# EAGLE board Intar_Modules_Prototype_Panel (EAGLE 7.3.0)
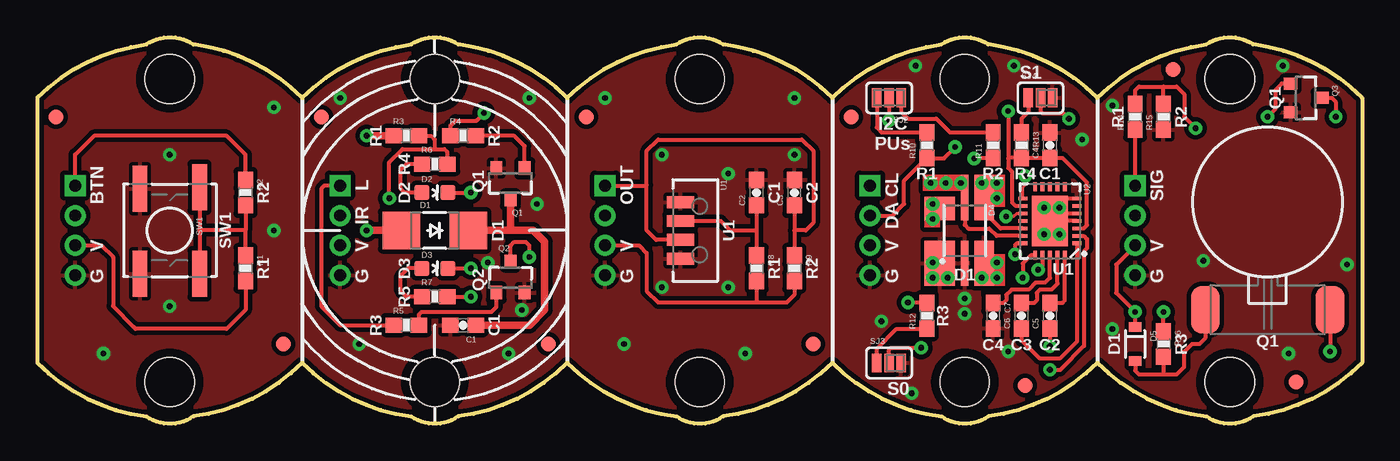
[diagram p0: board, top side]
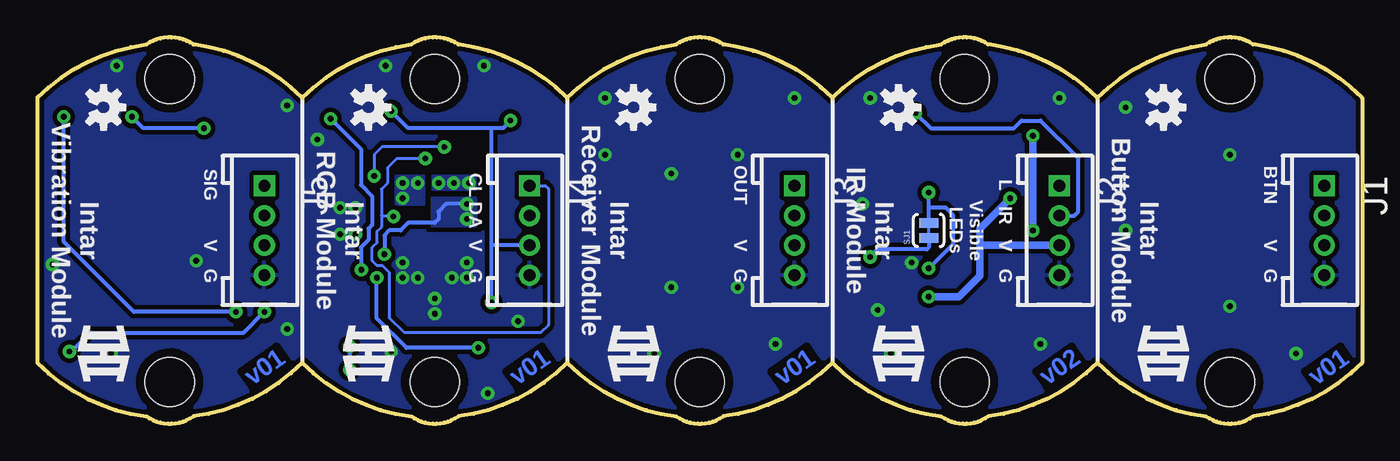
[diagram p1: board, bottom side, seen from below]

Size 88.9 x 25.91 mm. Coordinates in mm from the lower left corner, seen from the top.
Outline: 0,21.85 0,4.07 arc38 7.32,0.48 arc69 10.46,0.48 arc38 17.78,4.07 arc38 25.09,0.48 arc69 28.25,0.48 arc38 35.56,4.07 arc38 42.88,0.48 arc69 46.02,0.48 arc38 53.34,4.07 arc38 60.66,0.48 arc69 63.8,0.48 arc38 71.12,4.07 arc38 78.44,0.48 arc69 81.58,0.48 arc38 88.9,4.07 88.9,21.85 arc38 81.58,25.43 arc69 78.44,25.43 arc38 71.12,21.85 arc38 63.8,25.43 arc69 60.66,25.43 arc38 53.34,21.85 arc38 46.02,25.43 arc69 42.88,25.43 arc38 35.56,21.85 arc38 28.25,25.43 arc69 25.09,25.43 arc38 17.78,21.85 arc38 10.46,25.43 arc69 7.32,25.43 arc38 0,21.85
Copper layers (1*16): Top 0.035mm / dielectric 1.5mm / Bottom 0.035mm
Design rules "SparkFun-2-layer": minimum track width 7mil, minimum drill 15mil, track to track 8mil, track to pad 8mil, pad to pad 8mil, via to via 8mil, smd to smd 8mil, copper to edge 8mil, drill to drill 8mil, minimum pad ring 12mil, minimum via ring 10mil, stop-mask expansion 4mil, vias tented up to drill 20mil, thermal gap 10mil
tRestrict: area 69.5,13.8 to 70,13.9

## Footprints (pad centres in the part's own frame; a part is rotated, then mirrored left to right if it is on the bottom)
0603-CAP = smd 1.1 x 1: 1 -0.85,0; 2 0.85,0
IR42-21C/TR8 = smd 2.5 x 2.5: A 0,-2.25; C 0,2.25
LED-0603 = smd 1 x 1: A 0,-0.877; C 0,0.877
ASMT-YTB7-0AA02_M = smd 3.05 x 2.05: 1 2.2,-1.675 | smd 3.05 x 0.5: 2 2.2,0; 5 -2.2,0 | smd 3.05 x 1.3: 3 2.2,1.3; 4 -2.2,1.3 | smd 1.6 x 2.05: 6 -1.475,-1.675
SOD-323 = smd 0.63 x 0.83: A 1.15,0; C -1.15,0
FIDUCIAL-1X2 = smd 1 x 1: 1 0,0
4P-2.0 = drill 0.8 pad 1.27 square: 1 -3,0 | drill 0.8 pad 1.27: 2 -1,0; 3 1,0; 4 3,0
VIBE_COIN_SMD = smd 1.905 x 3.175: 1 4.191,-7.229; 2 -4.191,-7.229
SOT23-3 = smd 0.8 x 0.9: 1 -0.95,-1; 2 0.95,-1; 3 0,1.1
0603-RES = smd 1.1 x 1: 1 -0.85,0; 2 0.85,0
PAD-JUMPER-2-NC_BY_TRACE_YES_SILK = smd 0.635 x 1.27: 1 -0.508,0; 2 0.508,0
SJ_3_PASTE1&2&3 = smd 0.635 x 1.27: 1 -0.813,0; 2 0,0; 3 0.813,0
SJ_3_PASTE2&3 = smd 0.635 x 1.27: 1 -0.813,0; 2 0,0; 3 0.813,0
STAND-OFF = hole 3.302: 0,0
KSCXXXG = smd 3.1 x 1: 1 -2.9,2; 2 2.9,2; 3 -2.794,-2; 4 2.9,-2
TSOP754XXW = smd 0.8 x 1.8: 1 -1.905,-1.3; 2 -0.635,-1.3; 3 0.635,-1.3; 4 1.905,-1.3
WQFN-24_LONG = smd 0.25 x 0.6: 1 1.5,1.8; 2 1,1.8; 3 0.5,1.8; 4 0,1.8; 5 -0.5,1.8; 6 -1,1.8; 7 -1.5,1.8; 13 -1.5,-1.8; 14 -1,-1.8; 15 -0.5,-1.8; 16 0,-1.8; 17 0.5,-1.8; 18 1,-1.8; 19 1.5,-1.8 | smd 0.6 x 0.25: 8 -2.3,1; 9 -2.3,0.5; 10 -2.3,0; 11 -2.3,-0.5; 12 -2.3,-1; 20 2.3,-1; 21 2.3,-0.5; 22 2.3,0; 23 2.3,0.5; 24 2.3,1 | smd 3.4 x 2.4: PAD 0,0

## Placement (x,y rotation side)
C1  DNP  [0603-CAP]  28.57,6.61 180 top
C2  1.0uF  [0603-CAP]  48.26,15.5 90 top
C3  47nF  [0603-CAP]  50.8,15.5 90 top
C4  1.0uF  [0603-CAP]  67.94,18.67 90 top
C5  0.047uF  [0603-CAP]  67.94,7.24 90 top
C6  0.047uF  [0603-CAP]  66.04,7.24 90 top
C7  1.0uF  [0603-CAP]  64.14,7.24 270 top
D1  IR  [IR42-21C/TR8]  26.67,12.96 270 top
D2  [LED-0603]  26.67,15.5 270 top
D3  [LED-0603]  26.67,10.42 270 top
D4  LED_RGB_6PASMT_M  [ASMT-YTB7-0AA02_M]  62.23,12.96 270 top
D5  250mA/100V  [SOD-323]  73.66,5.34 270 top
FID1  FIDUCIAL1X2  [FIDUCIAL-1X2]  1.27,20.58 0 top
FID2  FIDUCIAL1X2  [FIDUCIAL-1X2]  16.51,5.34 0 top
FID3  FIDUCIAL1X2  [FIDUCIAL-1X2]  19.05,20.58 270 top
FID4  FIDUCIAL1X2  [FIDUCIAL-1X2]  34.29,5.34 270 top
FID5  FIDUCIAL1X2  [FIDUCIAL-1X2]  36.83,20.58 0 top
FID6  FIDUCIAL1X2  [FIDUCIAL-1X2]  52.07,5.34 0 top
FID7  FIDUCIAL1X2  [FIDUCIAL-1X2]  54.61,20.58 0 top
FID8  FIDUCIAL1X2  [FIDUCIAL-1X2]  66.29,2.54 0 top
FID9  FIDUCIAL1X2  [FIDUCIAL-1X2]  84.45,2.8 0 top
FID10  FIDUCIAL1X2  [FIDUCIAL-1X2]  76.2,23.75 0 top
J1  GROVE-4P-2.0-3470130P1  [4P-2.0]  2.54,12.96 270 bottom
J2  GROVE-4P-2.0-3470130P1  [4P-2.0]  20.32,12.96 270 bottom
J3  GROVE-4P-2.0-3470130P1  [4P-2.0]  38.1,12.96 270 bottom
J4  GROVE-4P-2.0-3470130P1  [4P-2.0]  55.88,12.96 270 bottom
J5  GROVE-4P-2.0-3470130P1  [4P-2.0]  73.66,12.96 270 bottom
LOGO1  OSHW-LOGOS  [OSHW-LOGO-S]  13.34,21.21 270 bottom
LOGO2  OSHW-LOGOS  [OSHW-LOGO-S]  31.11,21.21 270 bottom
LOGO3  OSHW-LOGOS  [OSHW-LOGO-S]  48.9,21.21 270 bottom
LOGO4  OSHW-LOGOS  [OSHW-LOGO-S]  66.67,21.21 270 bottom
LOGO5  OSHW-LOGOS  [OSHW-LOGO-S]  84.45,21.21 270 bottom
M1  MOTORVIBE_COIN_SMD  [VIBE_COIN_SMD]  82.55,14.86 0 top
Q1  MMBT2222A  [SOT23-3]  31.75,16.13 180 top
Q2  MMBT2222A  [SOT23-3]  31.75,9.78 0 top
Q3  MMBT2222A  [SOT23-3]  85.09,21.85 270 top
R1  10K  [0603-RES]  13.97,10.42 270 top
R2  100  [0603-RES]  13.97,15.5 270 top
R3  33  [0603-RES]  24.77,19.31 0 top
R4  2.2k  [0603-RES]  28.57,19.31 0 top
R5  2.2k  [0603-RES]  24.77,6.61 0 top
R6  *  [0603-RES]  26.67,17.4 0 top
R7  *  [0603-RES]  26.67,8.51 0 top
R8  100  [0603-RES]  48.26,10.42 270 top
R9  2.2k  [0603-RES]  50.8,10.42 270 top
R10  4.7K  [0603-RES]  59.69,18.67 90 top
R11  4.7K  [0603-RES]  64.14,18.67 90 top
R12  10K  [0603-RES]  59.69,7.24 90 top
R13  10K  [0603-RES]  66.04,18.67 270 top
R14  1K  [0603-RES]  73.66,20.58 90 top
R15  100k  [0603-RES]  75.56,20.58 90 top
R16  12  [0603-RES]  75.56,5.34 270 top
SJ1  JUMPER-PAD-2-NC_BY_TRACE  [PAD-JUMPER-2-NC_BY_TRACE_YES_SILK]  29.08,12.96 90 bottom
SJ2  [SJ_3_PASTE1&2&3]  57.15,21.85 180 top
SJ3  [SJ_3_PASTE2&3]  57.15,4.07 0 top
SJ4  [SJ_3_PASTE2&3]  67.31,21.85 0 top
STANDOFF1  STAND-OFF  [STAND-OFF]  8.89,2.8 0 top
STANDOFF2  STAND-OFF  [STAND-OFF]  8.89,23.12 0 top
STANDOFF3  STAND-OFF  [STAND-OFF]  26.67,2.8 0 top
STANDOFF4  STAND-OFF  [STAND-OFF]  26.67,23.12 0 top
STANDOFF5  STAND-OFF  [STAND-OFF]  44.45,2.8 0 top
STANDOFF6  STAND-OFF  [STAND-OFF]  44.45,23.12 0 top
STANDOFF7  STAND-OFF  [STAND-OFF]  62.23,23.12 0 top
STANDOFF8  STAND-OFF  [STAND-OFF]  62.23,2.8 0 top
STANDOFF9  STAND-OFF  [STAND-OFF]  80.01,23.12 0 top
STANDOFF10  STAND-OFF  [STAND-OFF]  80.01,2.8 0 top
SW1  SWITCH_MOMENTARY  [KSCXXXG]  8.89,12.96 270 top
U1  IR_RECEIVER  [TSOP754XXW]  44.45,12.96 270 top
U2  LP5521LONG  [WQFN-24_LONG]  67.94,13.59 270 top
U$1  LOGOSM  [LOGO_SM]  13.34,4.7 270 bottom
U$2  LOGOSM  [LOGO_SM]  31.11,4.7 270 bottom
U$3  LOGOSM  [LOGO_SM]  48.9,4.7 270 bottom
U$4  LOGOSM  [LOGO_SM]  66.67,4.7 270 bottom
U$5  LOGOSM  [LOGO_SM]  84.45,4.7 270 bottom

## Library data of the parts
C1 = SparkFun-Capacitors; PROD_ID: CAP-00867
C2 C4 C7 = SparkFun-Capacitors; PROD_ID: CAP-00868
C3 = SparkFun-Capacitors; PROD_ID: CAP-08605
C5 C6 = SparkFun-Capacitors
D1 = Intar_Eagle_Library; MFG_NAME: IR42-21C/TR8
D2 D3 = SparkFun-LED
D4 M1 SW1 U1 U2 U$1-U$5 = Intar_Eagle_Library
D5 = SparkFun-DiscreteSemi; PROD_ID: DIO-09646
FID1-FID10 LOGO1-LOGO5 = SparkFun-Aesthetics
J1-J5 = Connector
Q1-Q3 = SparkFun-DiscreteSemi; PROD_ID: TRANS-08049
R1 R12 R13 = SparkFun-Resistors; PROD_ID: RES-00824
R2 R8 = SparkFun-Resistors; PROD_ID: RES-07863
R3 R6 R7 R16 = SparkFun-Resistors
R4 R5 R9 = SparkFun-Resistors; PROD_ID: RES-08272
R10 R11 = SparkFun-Resistors; PROD_ID: RES-07857
R14 = SparkFun-Resistors; PROD_ID: RES-07856
R15 = SparkFun-Resistors; PROD_ID: RES-07828
SJ1 = SparkFun-Passives
SJ2-SJ4 = SparkFun-Retired
STANDOFF1-STANDOFF10 = SparkFun-Electromechanical

## Nets
B: D4.6 U2.19
BTN: J1.1 R2.1
G: D4.5 U2.18
GND: J1.4 SW1.3 SW1.4
GND1: C1.2 J2.4 Q1.2 Q2.2
GND2: C2.2 C3.2 J3.4 U1.1 U1.4
GND3: C4.2 C7.2 D4.1 D4.2 D4.3 J4.4 SJ3.3 SJ4.3 U2.4 U2.5 U2.7 U2.PAD
GND4: J5.4 Q3.2 R15.1
IR: J2.2 R4.1
LEDS: J2.1 R5.1
N$1: R1.1 R2.2 SW1.1 SW1.2
N$2: Q1.1 R4.2
N$3: D1.A R3.1
N$4: C1.1 D1.C Q1.3
N$5: Q2.1 R5.2
N$6: D2.A R6.1
N$7: D2.C D3.C SJ1.2
N$8: D3.A R7.1
N$9: Q2.3 SJ1.1
N$10: C2.1 R8.1 U1.2
N$11: C5.1 U2.2
N$12: C5.2 U2.24
N$13: C6.1 U2.1
N$14: C6.2 U2.23
N$15: C7.1 U2.22
N$16: R10.2 SJ2.3
N$17: R11.2 SJ2.1
N$18: R12.1 SJ3.1
N$19: R13.1 SJ4.1
N$20: Q3.1 R14.2 R15.2
N$21: Q3.3 R16.1
N$22: D5.A M1.2 R16.2
OUT: C3.1 J3.1 R9.1 U1.3
R: D4.4 U2.17
SCL: J4.1 R11.1 U2.15
SDA: J4.2 R10.1 U2.13
SEL0: SJ3.2 U2.20
SEL1: SJ4.2 U2.21
SIG: J5.1 R14.1
VCC: J1.3 R1.2
VCC1: J2.3 R3.2 R6.2 R7.2
VCC2: J3.3 R8.2 R9.2
VCC3: C4.1 J4.3 R12.2 R13.2 SJ2.2 U2.3 U2.14
VCC4: D5.C J5.3 M1.1

## Tracks (layer width: path | path; a pad name or v marks a point on that pad's centre or on a via)
B  (via drill 0.38)
  Top 0.254: D4.6 60.37,14.43 v60.07,14.73 | U2.19 65.73,12.09 65.61,11.96 v65.61,11.36
  Bottom 0.254: v60.07,14.73 61.47,14.73 61.98,14.23 61.98,13.72 62.23,13.46 64.01,13.46 64.52,12.96 65.28,12.96 65.61,12.63 v65.61,11.36
  other vias: 60.07,13.72
  pour Bottom (isolate 0.305, rank 2): 59.54,13.26 62.36,13.26 62.36,15.11 59.54,15.11
BTN
  Top 0.254: J1.1 2.54,18.04 3.81,19.31 12.7,19.31 13.97,18.04 R2.1
G  (via drill 0.38)
  Top 0.254: v61.98,16.13 62.23,15.88 D4.5 62.23,13.34 62.48,13.08 63.88,13.08 64.37,12.59 U2.18
  other vias: 60.96,16.13 59.94,16.13
  pour Bottom (isolate 0.305, rank 2): 59.54,16.56 62.36,16.56 62.36,15.75 59.54,15.75
GND  (via drill 0.38)
  other vias: 8.89,7.88 8.89,18.04 15.88,12.96 15.88,21.21 4.45,4.7
  pour Top (isolate 0.305): 17.78,26.93 0,26.93 0,-1.01 17.78,-1.01
  pour Bottom (isolate 0.305, rank 4): 0,26.93 0,-1.01 17.78,-1.01 17.78,26.93
GND1  (via drill 0.38)
  other vias: 32.51,7.62 30.23,10.8 31.62,4.7 21.59,5.34 20.32,21.85 33.02,21.85 33.53,14.73
  pour Top (isolate 0.305): 17.78,26.93 35.56,26.93 35.56,-1.01 17.78,-1.01
  pour Bottom (isolate 0.305, rank 4): 17.78,26.93 35.56,26.93 35.56,-1.01 17.78,-1.01
GND2  (via drill 0.38)
  other vias: 50.8,21.85 46.35,9.15 39.37,5.34 38.1,21.85 47.5,4.7 46.35,16.77 50.8,18.04 41.91,18.04 41.91,9.15
  pour Top (isolate 0.305): 35.56,26.93 35.56,-1.01 53.34,-1.01 53.34,26.93
  pour Bottom (isolate 0.305, rank 4): 35.56,26.93 53.34,26.93 53.34,-1.01 35.56,-1.01
GND3  (via drill 0.38)
  Top 0.254: U2.7 68.33,15.09 68.28,15.04 68.28,14.48 68.66,14.09 | U2.4 U2.PAD 68.44,14.09 68.66,14.09 | U2.5 68.66,14.09 | D4.3 64.35,10.76 v64.39,10.8
  other vias: 60.07,10.8 60.07,9.78 61.09,9.78 64.39,9.78 63.37,9.78 62.23,8.38 62.23,7.37 68.58,14.48 67.56,14.48 68.58,12.7 67.56,12.7 56.64,6.86 65.15,4.83 58.93,24 65.53,24 70.1,19.05 58.67,2.03
  pour Bottom (isolate 0.305, rank 4): 53.34,26.93 71.12,26.93 71.12,-1.01 53.34,-1.01
  pour Top (isolate 0.305): 53.34,26.93 71.12,26.93 71.12,-1.01 53.34,-1.01
GND4  (via drill 0.38)
  other vias: 72.14,21.34 72.14,6.35 83.95,4.7 87.88,10.67 83.57,24 78.23,10.92
  pour Top (isolate 0.305): 71.12,26.93 71.12,-1.01 88.9,-1.01 88.9,26.93
  pour Bottom (isolate 0.305, rank 4): 71.12,26.93 88.9,26.93 88.9,-1.01 71.12,-1.01
IR  (via drill 0.38)
  Top 0.254: R4.1 27.73,19.98 28.07,20.32 29.46,20.32 v29.97,20.83
  Bottom 0.254: v29.97,20.83 28.96,19.81 23.37,19.81 22.86,20.32 21.59,20.32 19.05,17.78 19.05,14.23 19.32,13.96 J2.2
LEDS
  Top 0.254: J2.1 19.26,15.96 19.05,15.75 19.05,7.88 20.32,6.61 R5.1
N$1
  Top 0.254: SW1.1 10.89,12.96 | 10.89,12.96 SW1.2 | R2.2 13.97,12.96 | 13.97,12.96 10.89,12.96 | R1.1 13.97,12.96
N$2
  Top 0.254: Q1.1 32.7,18.61 32,19.31 R4.2
N$3  (via drill 0.38)
  Top 0.508: D1.A v22.1,12.96 | R3.1 v22.1,19.31
  Bottom 0.508: v22.1,19.31 v22.1,12.96
N$4
  Top 0.508: Q1.3 31.75,12.96 | C1.1 33.02,6.61 34.04,7.62 34.04,12.19 33.27,12.96 31.75,12.96 | D1.C 31.75,12.96
N$5
  Top 0.254: Q2.1 30.8,7.81 30.48,7.49 25.78,7.49 25.61,7.33 R5.2
N$6
  Top 0.254: R6.1 24.77,17.4 24.38,17.02 24.38,15.75 24.64,15.5 D2.A
N$7  (via drill 0.38)
  Top 0.254: D2.C v29.08,15.5 | D3.C v29.08,10.42
  Bottom 0.254: SJ1.2 29.08,14.48 | 29.08,14.48 v29.08,15.5 | v29.08,10.42 27.43,12.07 27.43,13.97 27.94,14.48 29.08,14.48
N$8
  Top 0.254: D3.A 24.89,10.42 24.38,9.91 24.38,8.89 24.77,8.51 R7.1
N$9  (via drill 0.38)
  Top 0.254: Q2.3 31.75,11.94 32,12.19 32.77,12.19 33.02,11.94 v33.02,11.18
  Bottom 0.254: SJ1.1 29.08,11.81 29.21,11.69 32.51,11.69 v33.02,11.18
N$10
  Top 0.254: C2.1 48.26,12.96 | 48.26,12.96 R8.1 | U1.2 45.85,13.59 46.48,12.96 48.26,12.96
N$11  (via drill 0.38)
  Top 0.254: U2.2 70.22,12.59 70.43,12.37 70.43,11.76 70.23,11.56 70.23,5.21 68.63,3.61 v67.94,3.61 | C5.1 v67.94,5.18
  Bottom 0.254: v67.94,5.18 v67.94,3.61
N$12
  Top 0.254: C5.2 68.8,8.09 68.94,8.24 U2.24
N$13
  Top 0.254: U2.1 69.75,5.48 68.66,4.4 67.23,4.4 66.04,5.59 C6.1
N$14
  Top 0.254: C6.2 66.89,8.09 67.06,8.26 67.06,8.76 67.28,8.99 68.05,8.99 68.44,9.39 U2.23
N$15
  Top 0.254: C7.1 64.86,8.09 65.02,8.26 65.02,8.64 65.38,8.99 66.52,8.99 66.98,9.45 67.61,9.45 67.94,9.78 U2.22
N$16
  Top 0.254: SJ2.3 56.34,19.86 56.68,19.52 R10.2
N$17
  Top 0.254: R11.2 61.25,19.52 60.33,20.45 58.42,20.45 57.96,20.91 SJ2.1
N$18
  Top 0.254: SJ3.1 56.34,5.03 57.66,6.35 59.65,6.35 R12.1
N$19
  Top 0.254: SJ4.1 66.5,20.91 66.04,20.45 R13.1
N$20  (via drill 0.38)
  Top 0.254: R14.2 73.66,22.35 73.91,22.61 75.56,22.61 | 75.56,22.61 76.45,22.61 76.96,22.1 76.96,20.58 v77.72,19.81 | R15.2 75.56,22.61 | Q3.1 83.5,22.8 83.06,22.35 83.06,21.08 v82.55,20.58
  Bottom 0.254: v77.72,19.81 81.79,19.81 v82.55,20.58
N$21  (via drill 0.38)
  Top 0.254: R16.1 v75.56,7.49 | Q3.3 86.87,21.85 87.12,21.59 v87.12,20.58
  Bottom 0.254: v75.56,7.49 82.42,7.49 87.12,12.19 v87.12,20.58
N$22
  Top 0.254: D5.A 73.66,3.56 73.91,3.3 75.56,3.3 | 75.56,3.3 76.45,3.3 76.96,3.81 76.96,4.83 77.47,5.34 77.98,5.34 78.36,5.72 M1.2 | R16.2 75.56,3.3
OUT
  Top 0.254: U1.3 41.53,12.32 40.89,12.96 40.89,16 | 40.89,16 40.89,18.29 41.66,19.05 51.31,19.05 52.07,18.29 52.07,13.46 51.56,12.96 50.8,12.96 | C3.1 50.8,12.96 | 50.8,12.96 R9.1 | J3.1 40.85,15.96 40.89,16
R  (via drill 0.38)
  Top 0.254: v64.39,15.11 63.57,15.11 D4.4 63.5,15.13 63.5,14.23 64.64,13.09 U2.17
  other vias: 64.39,16.13 63.37,16.13
  pour Bottom (isolate 0.305, rank 2): 62.99,16.56 64.82,16.56 64.82,14.73 62.99,14.73
SCL  (via drill 0.38)
  Top 0.203: U2.15 65.7,14.09 65.51,13.9 v65,13.9
  Top 0.254: R11.1 64.1,17.78 v62.87,17.78
  Bottom 0.203: v62.87,17.78 64.77,17.78 65.41,17.15 65.41,16.13 65.81,15.72 65.81,13.95 | 65.81,13.95 65.81,13.18 66.09,12.9 66.09,12.14 66.42,11.81 66.42,10.92 66.12,10.62 65.76,10.62 65.28,10.14 65.28,7.11 64.26,6.1 58.93,6.1 55.12,6.1 54.61,6.61 54.61,15.75 54.82,15.96 J4.1 | 65.81,13.95 65.76,13.9 v65,13.9
SDA  (via drill 0.38)
  Top 0.203: U2.13 66.14,15.85 66.29,16 v66.29,16.61
  Top 0.254: v61.59,18.54 60.83,17.78 59.73,17.78 R10.1 58.17,16.3 58.17,14.73 57.39,13.96 J4.2
  Bottom 0.203: 61.62,18.57 65.76,18.57 66.29,18.04 v66.29,16.61
  Bottom 0.254: 61.62,18.57 v61.59,18.54
SEL0  (via drill 0.38)
  Top 0.254: U2.20 66.66,11.29 66.12,10.75 v66.12,9.78 | SJ3.2 57.15,4.95 57.28,5.08 v59.31,5.08
  Bottom 0.254: v59.31,5.08 64.14,5.08 66.12,7.06 v66.12,9.78
SEL1  (via drill 0.38)
  Top 0.254: SJ4.2 67.31,20.96 67.44,20.83 68.83,20.83 v69.22,20.45 | U2.21 67.44,10.6 v67.16,10.31
  Bottom 0.254: v69.22,20.45 67.18,18.42 67.18,16 66.42,15.24 66.42,13.34 66.67,13.08 66.67,12.32 67.18,11.81 67.18,10.34 v67.16,10.31
SIG
  Top 0.254: J5.1 R14.1
VCC
  Top 0.254: J1.3 4.3,11.96 5.08,11.18 5.08,7.88 6.48,6.48 6.6,6.35 12.7,6.35 13.97,7.62 R1.2
VCC1  (via drill 0.38)
  Top 0.254: R6.2 27.52,18.2 27.3,18.42 26.67,18.42 | R7.2 v29.08,8.51 | 26.67,18.42 24.51,18.42 23.62,17.53 v23.62,15.11 | R3.2 26.42,19.31 26.67,19.05 26.67,18.42
  Bottom 0.254: 25.64,11.96 25.65,11.94
  Bottom 0.508: v29.08,8.51 27.05,8.51 25.65,9.91 25.65,11.94 25.65,13.08 v23.62,15.11 | J2.3 25.64,11.96
VCC2
  Top 0.254: J3.3 40.37,11.96 40.89,11.43 40.89,8.89 41.66,8.13 48.26,8.13 | 48.26,8.13 50.29,8.13 50.8,8.64 R9.2 | R8.2 48.26,8.13
VCC3  (via drill 0.38)
  Top 0.254: SJ2.2 v57.15,20.32 | U2.14 65.67,14.59 65.41,14.86 65.41,16.89 65.15,17.15 65.15,17.78 | U2.3 70.21,13.09 70.43,13.31 70.43,16.18 68.8,17.82 C4.1 R13.2 65.19,17.82 65.15,17.78 | R12.2 58.46,8.09 v58.42,8.13 | v65.15,20.96 65.15,17.78
  Bottom 0.254: 58.42,19.81 57.66,19.81 v57.15,20.32 | 58.42,19.81 64.01,19.81 v65.15,20.96 | v58.42,8.13 58.42,11.94 | 58.42,11.94 58.42,19.81 | J4.3 58.4,11.96 58.42,11.94
VCC4  (via drill 0.38)
  Top 0.254: J5.3 73.66,11.94 72.39,10.67 72.39,8.76 v73.66,7.49 D5.C | M1.1 v86.74,4.83
  Bottom 0.254: v86.74,4.83 86.61,4.83 85.34,6.1 75.06,6.1 v73.66,7.49

## Text on the board
Bottom: v01 | v02 | v01 | v01 | v01
tPlace: S1 | Q1 | I2C / PUs | R1 | R2 | R1 | R2 | R4 | BTN | R2 | L | D2 | Q1 | OUT | C1 | C2 | CL | R1 | R2 | R4 | C1 | SIG | IR | DA | SW1 | D1 | U1 | V | V | V | V | V | U1 | G | R1 | G | D3 | Q2 | G | R1 | R2 | G | D1 | G | R5 | R3 | C1 | R3 | C4 | C3 | C2 | Q1 | D1 | R3 | S0
bPlace: BTN | L | OUT | CL | SIG | IR | DA | Intar / Button Module | Visible / LEDs | Intar / IR Module | Intar / Receiver Module | Intar / RGB Module | Intar / Vibration Module | V | V | V | V | V | G | G | G | G | G